# EAGLE board Robotan (EAGLE 8.3.2)
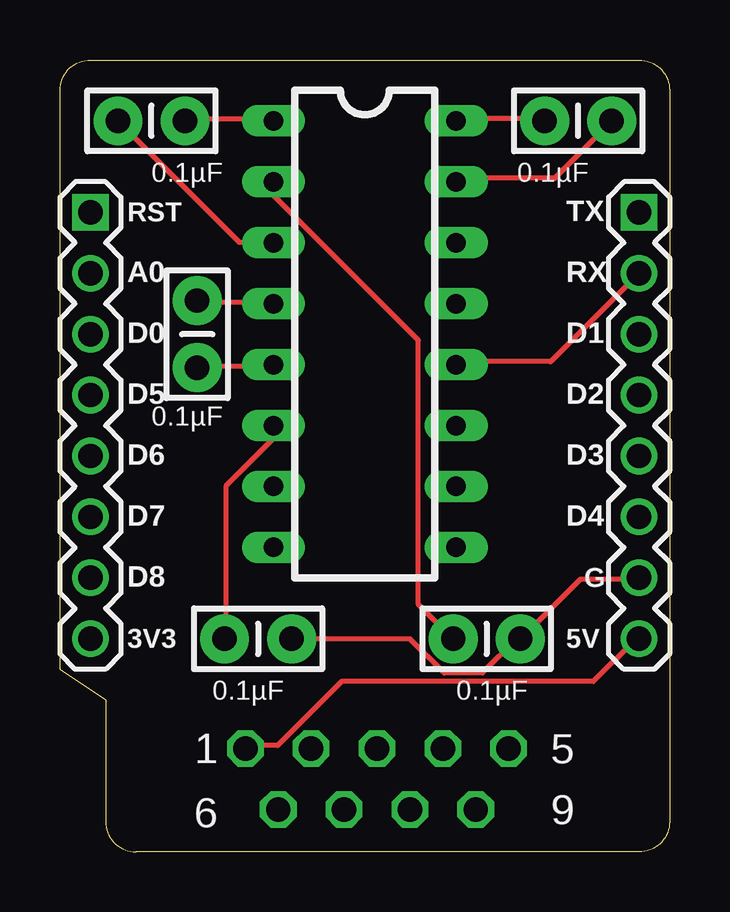
[diagram p0: board, top side]
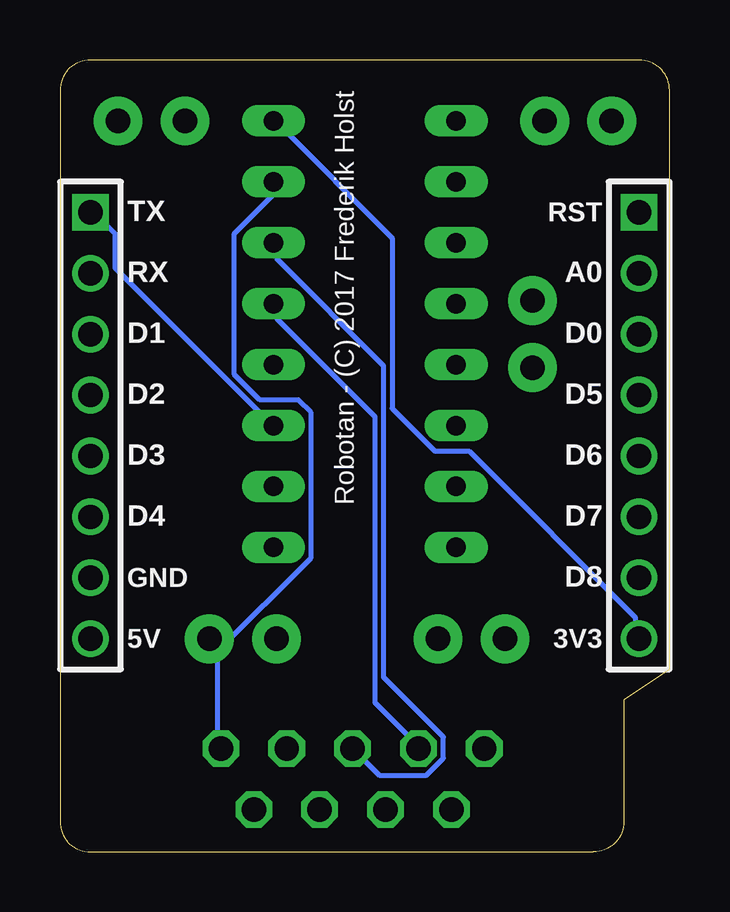
[diagram p1: board, bottom side, seen from below]

Size 25.4 x 33.02 mm. Coordinates in mm from the lower left corner, seen from the top.
Outline: 25.4,31.75 25.4,1.27 arc-90 24.13,0 3.17,0 arc-90 1.91,1.27 1.91,6.35 0,7.62 0,31.75 arc-90 1.27,33.02 24.13,33.02 arc-90 25.4,31.75
Copper layers (1*16): Top 0.035mm / dielectric 1.5mm / Bottom 0.035mm
Design rules "ElectroDragon_2layer_DRU_no_angle_20140221": minimum track width 6mil, minimum drill 12mil, track to track 6mil, track to pad 6mil, pad to pad 6mil, via to via 6mil, smd to smd 6mil, copper to edge 8mil, drill to drill 6mil, minimum pad ring 10mil, minimum via ring 6mil, stop-mask expansion 4mil, vias tented up to drill 100mil, thermal gap 10mil
Net classes: 0 default: width 0.203 mm, drill 0.356 mm, clearance 0.152 mm; 1 power: width 0.203 mm, clearance 0.152 mm

## Footprints (pad centres in the part's own frame; a part is rotated, then mirrored left to right if it is on the bottom)
CAP-PTH-SMALL-KIT = drill 1.016 pad 2.032: 1 -1.397,0; 2 1.397,0
1X08 = drill 1.016 square: 1 0,0 | drill 1.016: 2 2.54,0; 3 5.08,0; 4 7.62,0; 5 10.16,0; 6 12.7,0; 7 15.24,0; 8 17.78,0
DIL16 = drill 0.813 long: 1 -8.89,-3.81; 2 -6.35,-3.81; 3 -3.81,-3.81; 4 -1.27,-3.81; 5 1.27,-3.81; 6 3.81,-3.81; 7 6.35,-3.81; 8 8.89,-3.81; 9 8.89,3.81; 10 6.35,3.81; 11 3.81,3.81; 12 1.27,3.81; 13 -1.27,3.81; 14 -3.81,3.81; 15 -6.35,3.81; 16 -8.89,3.81
SUB-D9-MINIMAL = drill 1.016 octagon: 1 -5.486,1.27; 2 -2.743,1.27; 3 0,1.27; 4 2.743,1.27; 5 5.486,1.27; 6 -4.115,-1.27; 7 -1.372,-1.27; 8 1.372,-1.27; 9 4.115,-1.27

## Placement (x,y rotation side)
C1  0.1µF  [CAP-PTH-SMALL-KIT]  3.81,30.48 180 top
C2  0.1µF  [CAP-PTH-SMALL-KIT]  5.71,21.59 270 top
C3  0.1µF  [CAP-PTH-SMALL-KIT]  8.26,8.89 0 top
C4  0.1µF  [CAP-PTH-SMALL-KIT]  17.78,8.89 0 top
C5  0.1µF  [CAP-PTH-SMALL-KIT]  21.59,30.48 180 top
H1  [1X08]  1.27,26.67 270 top
H2  [1X08]  24.13,26.67 270 top
U1  MAX232PTH  [DIL16]  12.7,21.59 270 top
U$2  SUB-D9-MINIMAL  [SUB-D9-MINIMAL]  13.21,3.05 0 top

## Library data of the parts
C1-C5 = SparkFun-Capacitors; PROD_ID: CAP-08370
H1 H2 = freetronics-original
U1 = SparkFun-DigitalIC
U$2 = CODE-IT

## Nets
3V3: C5.2 H1.8 U1.16
5V: H2.8 U$2.1
A0: H1.2
C1+: C1.1 U1.1
C1-: C1.2 U1.3
C2+: C2.1 U1.4
C2-: C2.2 U1.5
D0: H1.3
D1: H2.3
D2: H2.4
D3: H2.5
D4: H2.6
D5: H1.4
D6: H1.5
D7: H1.6
D8: H1.7
GND: C3.2 C4.2 C5.1 H2.7 U1.15 U$2.5
RS232_RX: U1.14 U$2.3
RS232_TX: U1.13 U$2.2
RST: H1.1
RX: H2.2 U1.12
TX: H2.1 U1.11
V+: C4.1 U1.2
V-: C3.1 U1.6

## Tracks (layer width: path | path; a pad name or v marks a point on that pad's centre or on a via)
3V3
  Top 0.203: U1.16 16.54,30.58 20.09,30.58 C5.2
  Bottom 0.203: H1.8 1.42,8.89 1.42,9.78 8.36,16.71 9.78,16.71 11.56,18.49 11.56,25.6 16.36,30.4 U1.16
5V
  Top 0.203: U$2.1 7.82,4.45 9.07,4.45 11.73,7.11 22.23,7.11 24,8.89 H2.8
C1+
  Top 0.203: U1.1 8.89,30.58 5.33,30.58 C1.1
C1-
  Top 0.203: C1.2 7.47,25.43 8.89,25.43 U1.3
C2+
  Top 0.203: U1.4 8.89,22.94 5.87,22.94 C2.1
C2-
  Top 0.203: U1.5 8.89,20.27 5.87,20.27 C2.2
GND
  Top 0.203: U1.15 16.54,28.09 20.62,28.09 22.94,30.4 C5.1 | H2.7 24,11.38 21.69,11.38 19.2,8.89 C4.2 19.02,8.89 17.6,7.47 16,7.47 14.58,8.89 C3.2
  Bottom 0.203: 18.85,8.36 18.85,8.71 19.02,8.89 C4.2 18.85,8.36 | 18.85,8.36 18.85,4.45 U$2.5 | 18.85,8.36 14.94,12.27 14.94,18.31 15.47,18.85 17.07,18.85 18.14,19.91 18.14,25.78 16.54,27.38 16.54,27.91 U1.15
RS232_RX
  Bottom 0.203: U$2.3 12.09,3.2 10.13,3.2 9.42,3.91 9.42,4.8 11.91,7.29 11.91,20.27 16.36,24.71 16.36,25.25 U1.14
RS232_TX
  Bottom 0.203: U1.13 16.36,22.76 16.36,22.23 12.27,18.14 12.27,6.22 10.49,4.45 U$2.2
RX
  Top 0.203: H2.2 20.45,20.45 16.54,20.45 U1.12
TX
  Bottom 0.203: U1.11 16.54,17.78 23.11,24.36 23.11,25.78 24,26.67 H2.1
V+
  Top 0.203: U1.2 8.89,27.38 14.94,21.34 14.94,10.31 16.36,8.89 C4.1
V-
  Top 0.203: U1.6 8.89,17.25 6.93,15.29 6.93,8.89 C3.1

## Text on the board
tPlace: 0.1µF | 0.1µF | RST | TX | A0 | RX | D0 | D1 | D5 | D2 | 0.1µF | D6 | D3 | D7 | D4 | D8 | G | 3V3 | 5V | 0.1µF | 0.1µF
bPlace: Robotan - (C) 2017 Frederik Holst | RST | TX | A0 | RX | D0 | D1 | D5 | D2 | D6 | D3 | D7 | D4 | D8 | GND | 3V3 | 5V